# Altium PCB SensorSquare.PcbDoc
Units mil, origin at the board's own origin, x right, y up, seen from the top; angles counter-clockwise.
Board outline 2500 x 2500 mil, 2 copper layers (Top Layer, Bottom Layer); 45 components, 29 nets, 172 pads, 107 vias.
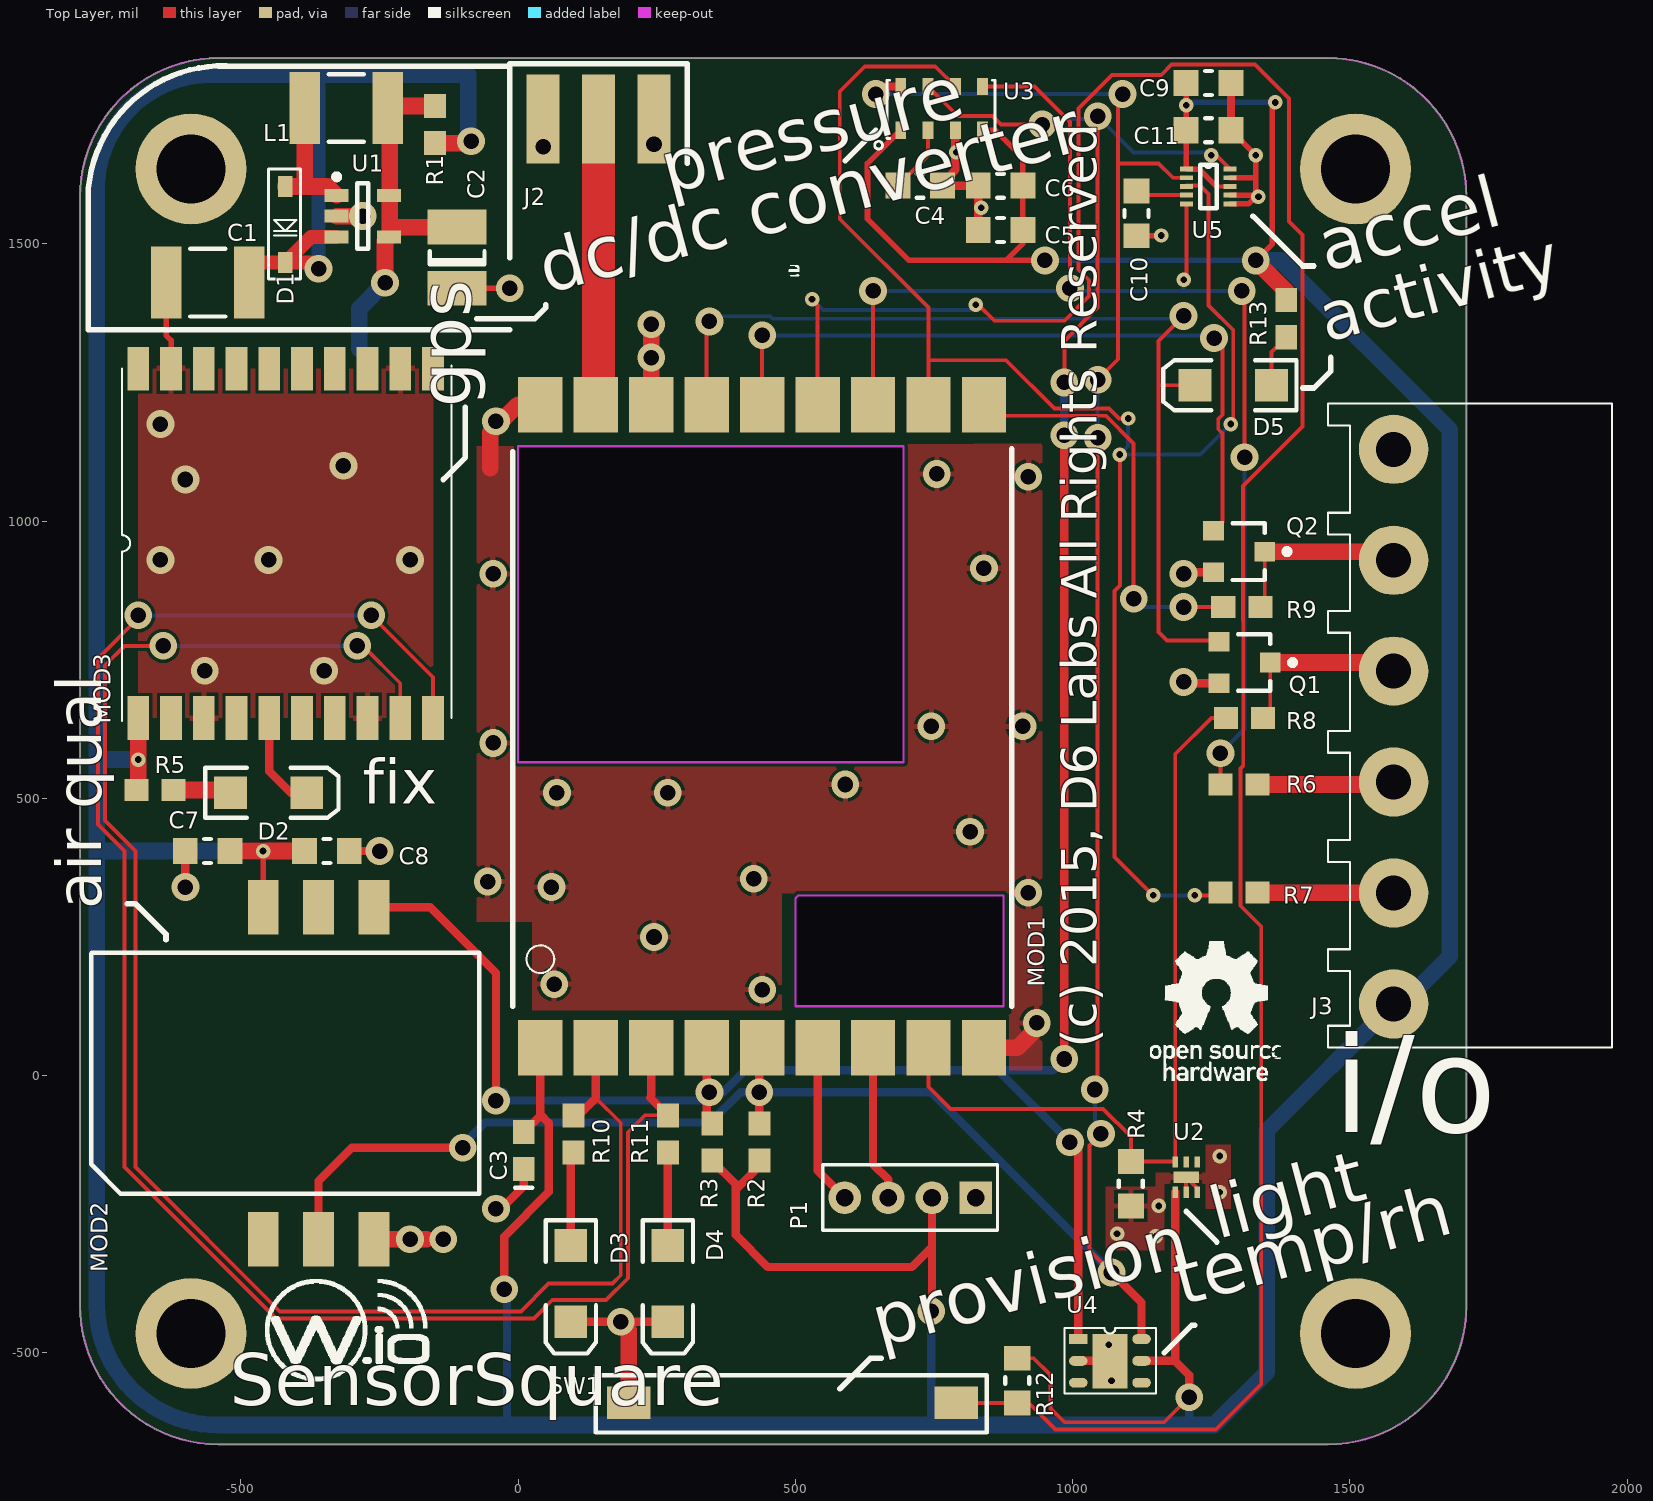
[diagram p0: Top Layer view]
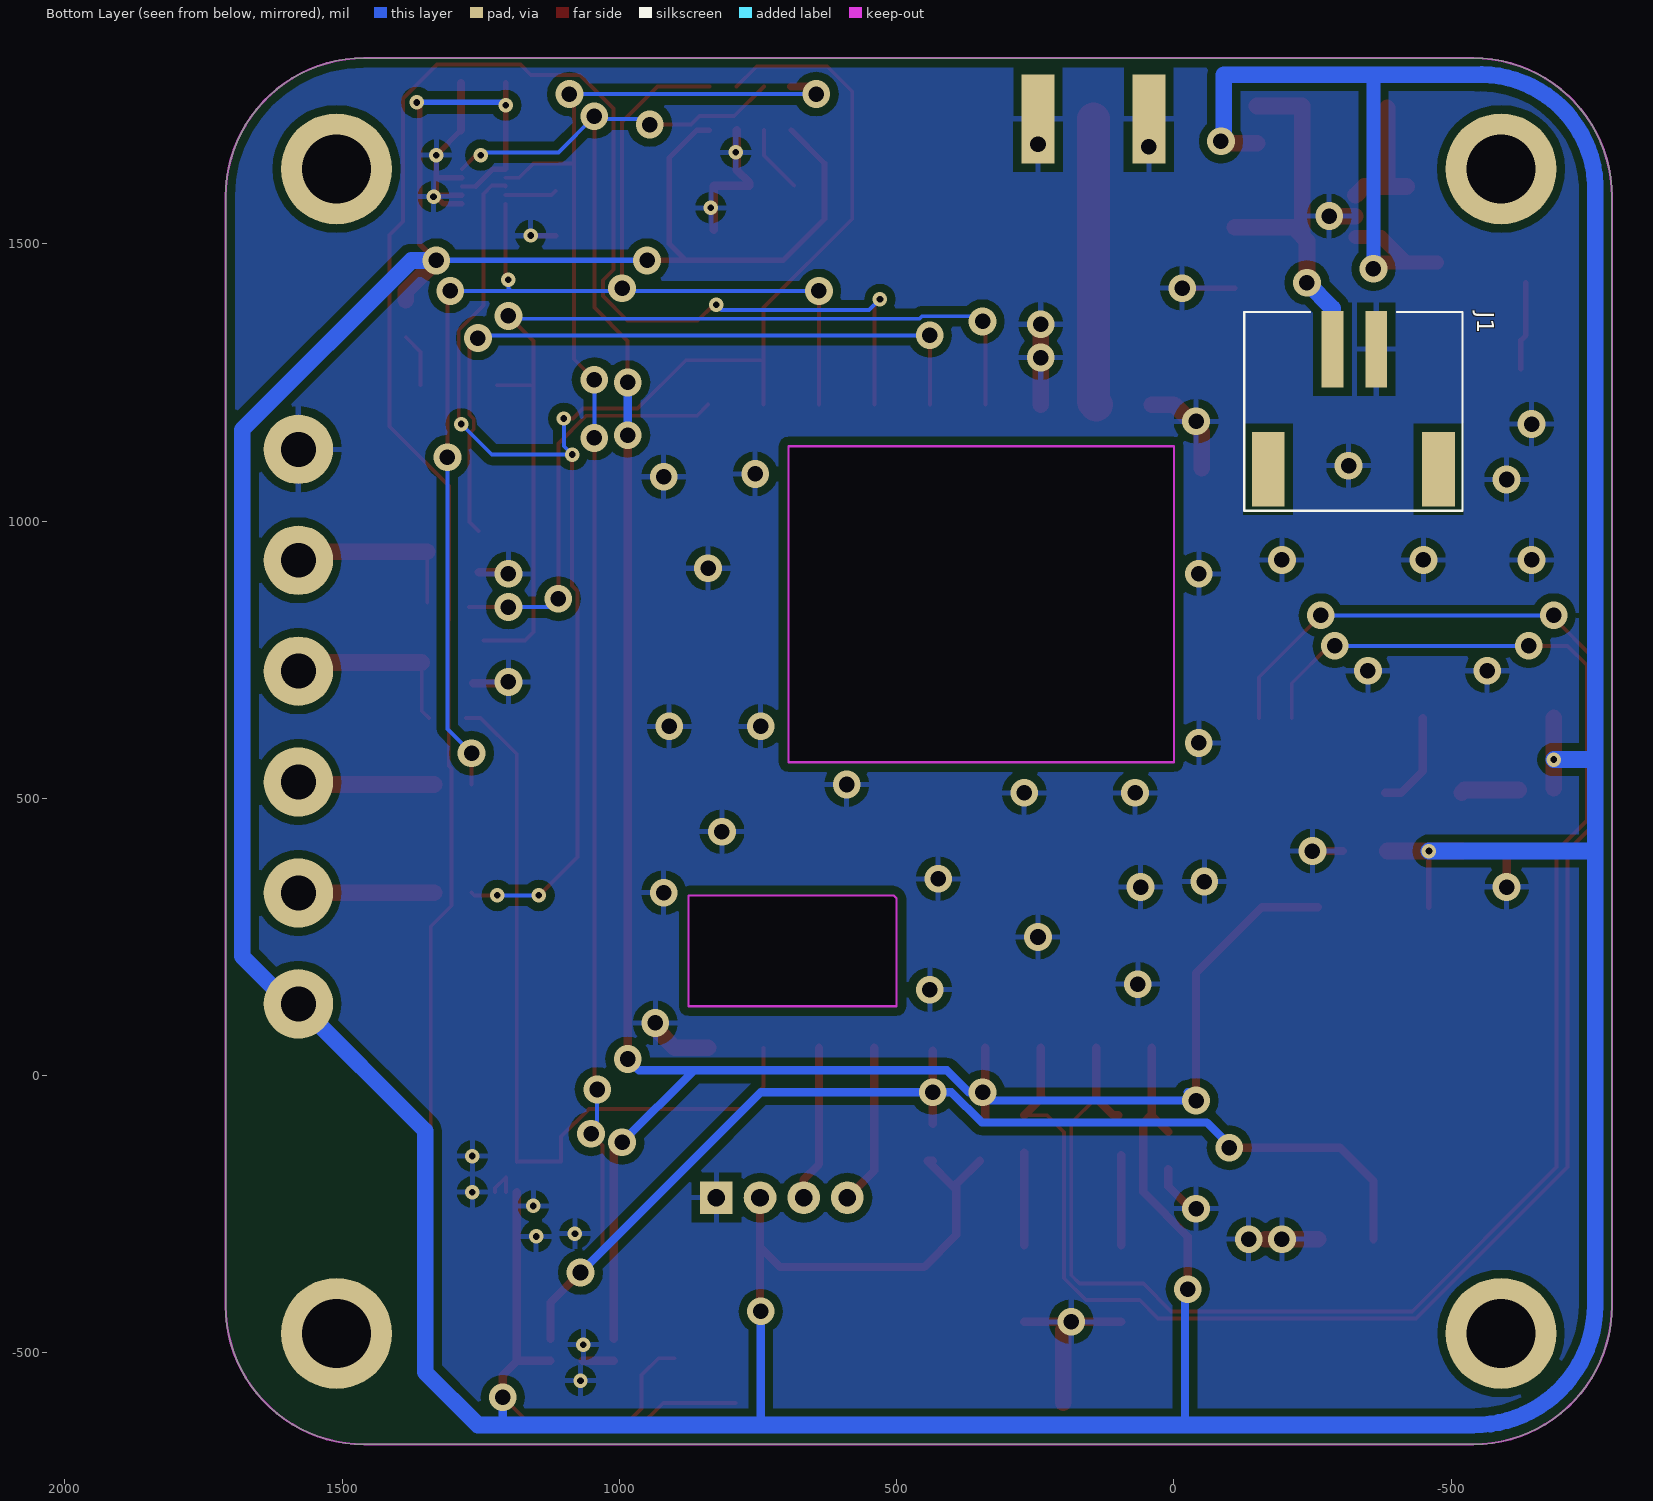
[diagram p1: Bottom Layer view, seen from below]

## Layer stack, top to bottom
Top Layer: signal copper 1.4
Dielectric: dielectric 12.6, FR-4, Dk 4.8
Bottom Layer: signal copper 1.4

## Board outline
-790,-415 -790,1585 cw(c-540,1585) -540,1835 1460,1835 cw(c1460,1585) 1710,1585 1710,-415 cw(c1460,-415) 1460,-665 -540,-665 cw(c-540,-415)
cut-out: 0,1135 0,565 695,565 695,1135
cut-out: 875,125 500,125 500,320 505,325 875,325

## Design rules (kind name [scope] priority, off if disabled: settings)
Clearance Clearance_1 [InNet('GND') And OnLayer('Bottom Layer')] p1: gap=15
Clearance [All] p2: gap=6
ComponentClearance [All] p1 off: gap=10 collisioncheckmode=3 verticalgap=10 showdistances=FALSE
HoleSize [All] p1: absolutevalues=TRUE maxlimit=150 minlimit=1 maxpercent=80.000 minpercent=20.000
MinimumSolderMaskSliver [All] p1 off: minsoldermaskwidth=10
PolygonConnect [All] p1: connectstyle=Relief reliefconductorwidth=10 reliefentries=4 polygonreliefangle="90 Angle"
RoomDefinition SensorSquare [InComponentClass('SensorSquare')] p1 off: confinementstyle=ConfineIn formatcopy=TRUE lockcomponents=FALSE outline -970,-665 10185,-665 10185,1920 -970,1920
RoutingVias [All] p1: holewidth=50 width=26 viastyle="Through Hole" minholewidth=12 minwidth=26 maxholewidth=28 maxwidth=50
SilkToSilkClearance [All] p1 off: silktosilkclearance=10
SilkscreenOverComponentPads [All] p1 off: minsilkscreentomaskgap=10
SolderMaskExpansion [All] p1: expansion=4
Width [All] p1: maxlimit=150 minlimit=7 preferedwidth=25
23 further rules are at their usual default settings.

## Components (designator, comment, footprint, x,y, rotation, side; value= is the part's Value field where it differs from the comment)
C1 "Cap Pol3" 1812 -560,1430 r180 top
C2 "22UF" 1210 -110,1475 r90 top
C3 "C0603" 0603 10,-135 r90 top
C4 ".01uF" D6_0603_RES 725,1605 r180 top
C5 "1000pF" D6_0603_RES 870,1525 r0 top
C6 ".01uF" D6_0603_RES 870,1605 r0 top
C7 ".01uF" D6_0603_RES -560,405 r0 top
C8 "1UF" D6_0603_RES -345,405 r180 top
C9 ".01uF" D6_0603_RES 1245,1790 r180 top
C10 ".01uF" D6_0603_RES 1115,1555 r90 top
C11 ".01uF" D6_0603_RES 1245,1705 r180 top
D1 "SCHOTKY DIODE" SOD123 -420,1535 r270 top
D2 "RXD" 3.2X1.6X1.1 -450,510 r0 top
D3 "RXD" 3.2X1.6X1.1 95,-375 r270 top
D4 "RXD" 3.2X1.6X1.1 270,-375 r270 top
D5 "RXD" 3.2X1.6X1.1 1289.5,1245 r180 top
J1 "BATTERY" S2B-PH-SM4 -365,1310 r270 bottom
J2 "SMA" RPSMA-EDGEMOUNT 145,1725 r90 top
J3 "6 POSITION PLUGGABLE HEADER" "6POS 5.08MM PLUGGABLE" 1500,90 r90 top
L1 "22UH" INDC4532 -310,1745 r180 top
MOD1 "WhiskerModule" WHISKER_SMD_DOLLY 40,50 r90 top
MOD2 "IAQ_ENGINE" IAQENGINE -70,-210 r90 top
MOD3 "GPS" GPS-SOP20 -685,645 r90 top
P1 "E1" 2MM4PINHDR 825,-220 r180 top
Q1 "BC846B" SOT23 1310,745 r270 top
Q2 "BC846B" SOT23 1300,945 r270 top
R1 "DNP" ERA-0603 -150,1715 r90 top
R2 "10K" 3-0603 435,-120 r270 top
R3 "10K" 3-0603 350,-120 r270 top
R4 "4.901K 1%" D6_0603_RES 1105,-195 r270 top
R5 "330" ERA-0603 -655,515 r0 top
R6 "DNP" ERA-0603 1300,525 r0 top
R7 "DNP" ERA-0603 1300,330 r0 top
R8 "DNP" ERA-0603 1310,645 r0 top
R9 "DNP" ERA-0603 1305,845 r0 top
R10 "330" ERA-0603 100,-105 r270 top
R11 "330" ERA-0603 270,-105 r270 top
R12 "330K" D6_0603_RES 900,-550 r270 top
R13 "330" ERA-0603 1385,1365 r270 top
SW1 "WAKEUP" MK23-35-B-2 495,-590 r180 top
U1 "500MA ALKALINE DC\DC BOOST REGULATOR SOT-23" SOT95P280X110-5N -280,1550 r0 top
U2 "Light Sensor" CUDFN6 1185,-210 r0 top
U3 "MPL3115A2" LGA8 690,1705 r90 top
U4 "Si7020" DFN6 1010,-475 r0 top
U5 "MMA8652" DFN10 1205,1635 r0 top

## Footprints (in the part's own frame and the unit in brackets; to place one, negate y for a bottom-side part, rotate by r counter-clockwise, add the part's x,y. Pads: shape width x height; smd on the part's side, far side on the other; paste and mask are expansions set on the pad)
2MM4PINHDR [mm]
  rect 1.5x1.5 hole 0.81: 1(0,0)
  round 1.5 hole 0.81: 2(2,0) 3(4,0) 4(6,0)
  silkscreen extent -1,-1.5 7,1.5
3-0603 [mm] "Chip Resistor; Body 1.6 x 0.9 mm (LxW typ)"
  rect 1.1x1 smd: 1(-0.85,0) 2(0.85,0)
3.2X1.6X1.1 [mm] "SMT LED; 2 Flat Leads"
  rect 1.5x1.5 smd: 1(-1.75,0) 2(1.75,0)
  silkscreen extent -2.9,-1.15 3.2,1.15
"6POS 5.08MM PLUGGABLE" [mm]
  round 3.175 hole 1.6: 1(1,-2) 2(6.08,-2) 3(11.16,-2) 4(16.24,-2) 5(21.32,-2) 6(26.4,-2)
  silkscreen extent -1,-12 28.5,1
0603 [mm] "Chip Capacitor; Body 1.6 x 0.8 mm (LxW typ)"
  rect 1.1x1 smd: 1(-0.85,0) 2(0.85,0)
  silkscreen extent -1.7,-0.4 -1.7,0.4
1210 [mm] "Chip Capacitor; Body 3.2 x 2.5 mm (LxW typ)"
  rect 1.6x2.7 smd: 1(-1.4,0) 2(1.4,0)
  silkscreen extent -0.3,-1.25 0.3,1.25
1812 [mm] "Chip Capacitor, Body 4.5x3.2mm, IPC High Density"
  rect 1.4x3.3 smd: 1(-1.9,0) 2(1.9,0)
  silkscreen extent -0.8,-1.55 0.8,1.55, body extent -2.4,-1.7 2.4,1.7, height 1.4
CUDFN6 [mm]
  rect 0.25x0.52 smd: 1(0,0) 2(0.5,0) 3(1,0) 4(1,1.38) 5(0.5,1.38) 6(0,1.38)
  rect 1.168x0.533 smd: PAD(0.5,0.682)
D6_0603_RES [mm] "Chip Resistor, 2-Leads, Body 2.0x1.2mm, IPC Medium Density"
  rect 1.14x1.2 smd: 1(-1.025,0) 2(1.025,0)
  silkscreen extent -0.15,-0.55 0.15,0.55, body extent -0.93,-0.41 0.77,0.39, height 0.56
DFN6 [mm]
  rect 0.85x0.45 smd: 1(0,0)
  oval 0.85x0.45 smd: 2(0,-1) 3(0,-2) 4(2.9,-2) 5(2.9,-1) 6(2.9,0)
  rect 1.6x2.5 smd: PAD(1.45,-1.016)
  silkscreen extent -0.64,-2.5 3.56,0.5
DFN10 [mm]
  rect 0.6x0.225 smd: 1(0,0) 2(0,-0.4) 3(0,-0.8) 4(0,-1.2) 5(0,-1.6) 6(2,-1.6) 7(2,-1.2) 8(2,-0.8) 9(2,-0.4) 10(2,0)
  silkscreen extent 0.64,-1.8 1.4,0.2
ERA-0603 [mm] "Chip Resistor; Body 1.6 x 0.8 mm (LxW typ)"
  rect 1.1x1 smd: 1(-0.85,0) 2(0.85,0)
GPS-SOP20 [mm]
  rect 2x1 smd: 1(0,0) 2(0,-1.5) 3(0,-3) 4(0,-4.5) 5(0,-6) 6(0,-7.5) 7(0,-9) 8(0,-10.5) 9(0,-12) 10(0,-13.5) 11(16,-13.5) 12(16,-12) 13(16,-10.5) 14(16,-9) 15(16,-7.5) 16(16,-6) 17(16,-4.5) 18(16,-3) 19(16,-1.5) 20(16,0)
  silkscreen extent -0.13,-14.35 16.13,0.75
IAQENGINE [mm]
  rect 2.5x1.4 smd: 1(-2.159,9.906) 2(-2.159,7.366) 3(-2.159,4.826) 4(13.041,4.826) 5(13.041,7.366) 6(13.041,9.906)
  silkscreen extent -0.07,0 10.96,17.78
INDC4532 [mm] "Chip Inductor, Body 4.5x3.2mm, IPC High Density"
  rect 1.4x3.3 smd: 1(-1.9,0) 2(1.9,0)
  silkscreen extent -0.8,-1.55 0.8,1.55, body extent -2.4,-1.7 2.4,1.7, height 0.55
LGA8 [mm]
  rect 0.8x0.5 smd: 1(0,0) 2(0,-1.25) 3(0,-2.5) 4(0,-3.75) 5(2,-3.75) 6(2,-2.5) 7(2,-1.25) 8(2,0)
  silkscreen extent -0.87,-4.32 2.29,1.19
MK23-35-B-2 [mm]
  rect 2x1.5 smd: 1(-7.5,0) 2(7.5,0)
  silkscreen extent -8.89,-1.27 9.02,1.36, body extent -7.8,-1.15 7.8,1.15, height 2.37
RPSMA-EDGEMOUNT [mil]
  rect 160x60 smd: 1(0,0) 2(0,100) 3(0,-100)
  rect 160x60 smd far side: 4(0,-100) 5(0,100)
  silkscreen extent -80,-160 100,160
S2B-PH-SM4 [mm]
  rect 3.5x1 smd: 1(0,0) 2(0,-2)
  rect 3.4x1.5 smd: P1(5.5,-4.95) P1(5.5,2.85)
  silkscreen extent -1.7,-6.05 7.4,3.95
SOD123 [mm]
  rect 0.97x0.65 smd: A(-1.74,0) K(1.74,0)
  silkscreen extent -2.54,-0.76 2.5,0.7, body extent -1.43,-0.76 1.43,0.74, height 0.57
SOT23 [mm] "SOT-23; 3 Leads; Body 3.1 x 2.5 mm, inc. leads (LxW max), Alternate Lead Configuration"
  rect 0.9x0.95 smd: 1(0,1.175) 2(0.95,-1.175) 3(-0.95,-1.175)
  silkscreen extent -1.3,-0.3 1.3,2.33
SOT95P280X110-5N [mm] "SOT23, 5-Leads, Body 3.0x3.0mm (max), Pitch 0.95mm, IPC Medium Density"
  rect 1.1x0.6 smd: 1(-1.2,0.95) 2(-1.2,0) 3(-1.2,-0.95) 4(1.2,-0.95) 5(1.2,0.95)
  silkscreen extent -1.32,-1.5 0.25,1.92, body extent -1.6,-1.52 1.6,1.48, height 0.92
WHISKER_SMD_DOLLY [mil]
  rect 100x80 smd: 1(0,0) 2(0,-100) 3(0,-200) 4(0,-300) 5(0,-400) 6(0,-500) 7(0,-600) 8(0,-700) 9(0,-800) 10(1160,-800) 11(1160,-700) 12(1160,-600) 13(1160,-500) 14(1160,-400) 15(1160,-300) 16(1160,-200) 17(1160,-100) 18(1160,0)
  silkscreen extent 75,-850 1080,50

## Part data
C1: "Polarized Capacitor (Surface Mount)"
C2 C4 C5 C6 C7 C8 C9 C10 C11: library part C1210, "Ceramic Chip Capacitor - Standard"
C3: "Ceramic Chip Capacitor - Standard"
D1: "SCHOTKY DIODE SOD-123"
D2 D3 D4 D5: library part LED2, "Typical RED, GREEN, YELLOW, AMBER GaAs LED"
J1: library part S2B-PH-SM4-TB, "2 POSITION, 2MM RIGHT ANGLE CONNECTOR"
L1: library part Inductor, "Inductor"
MOD1: "Whisker Footprint"
MOD2: "Indoor Air Quality Sensor Module"
MOD3: library part ULTIMATEGPS
P1: library part 2MM4PINHDR
Q1 Q2: "SOT23 NPN Silicon Planar General Purpose Transistor"
R1 R4 R5 R6 R7 R8 R9 R10 R11 R12 R13: library part ERA3Y, "Rectangular Thick Film Chip Resistor, 10 Ohm to 330k Ohm Range, 0.1% and 0.5% Tolerance, 0603 Size, 0.063 W"
R2 R3: library part ERJ3BQ, "Low Ohmic Value Thick Film Chip Resistor, 0.22 Ohm to 9.1 Ohm Range, 1%, 2% and 5% Tolerance, 0603 Size, 0.2 W"
SW1: library part MK23-35-B-2, "SMT Reed Switch"
U1: "SP6641A"
U2: library part NOA1212, "Ambient Light Sensor with Dark Comp"
U3: "Precision altimeter"
U4: "I2C Temperature and Humidity Sensor"
U5: "3-axis, 12-bit accelerometer"

## Free pads (board coordinates)
  round 200 hole 125 unplated paste-900: 0(-590,1635) 1(1510,1635) 2(1510,-465) 3(-590,-465)

## Via types
v1: diameter 50, hole 28, Top Layer to Bottom Layer, 82 vias
v2: diameter 26, hole 12, Top Layer to Bottom Layer, 25 vias

## Nets (pads, with @x,y where several pads share a name; then routed paths per layer and width w, separated by ;. In a path a pad name is that pad's centre, name@x,y a point inside that pad or via, vN(x,y) a via of type N, cw(c..) or ccw(c..) an arc to the next point about the centre after c; other vN are vias at no path point)
GND: C1.2 C2.1 C3.1 C4.1 C5.1 C6.1 C7.1 C8.1 C9.1 C10.1 C11.1 D3.2 D4.2 J1.1 J2.2 J2.3 J2.4 J2.5 J3.6 MOD1.9 MOD1.16 MOD1.18 MOD2.3 MOD3.3 MOD3.8 MOD3.12 MOD3.19 P1.1 Q1.2 Q2.2 R4.2 SW1.2 U1.2 U2.2 U2.3 U2.PAD U3.3 U4.2 U4.PAD U5.6 U5.7 U5.9 | length 2240.4
  Top Layer w7: U2.2 U2.PAD 1224.37,-202.83 U2.3
  Top Layer w10: C1.2 -634.8,1334.8 -625.94,1325.94 MOD3.19 ; C2.1 -15.12,1419.88 v1(-15,1420) ; C10.1 1159.65,1514.65 v2(1160,1515) ; U5.6 1317.01,1572.01 v2@1330,1585 ; U5.7 1327.24,1587.76 v2@1330,1585 ; U5.9 1329.25,1619.25 ; C11.1 1330,1660.35 v2(1330,1660) v2@1330,1585
  Top Layer w15: C7.1 -600.35,340.35 v1(-600,340) ; C8.1 v1(-250,405) ; v1(-40,-240) -30,-240 10,-200 C3.1 ; D3.2 v1(185,-443.9) D4.2 ; U3.3 788.43,1633.43 765.35,1610.35 C4.1 C6.1 C5.1 ; U4.2 U4.PAD@1066.46,-514.37 ; v1(1200,710) 1202.4,707.6 Q1.2 ; v1(1200,905) 1202.6,907.6 Q2.2 ; C11.1 C9.1
  Top Layer w30: U1.2 v1(-280,1550) ; MOD2.3 v1(-195,-295) -165,-295 ; -50,1095 -50,1160 0,1210 MOD1.18 ; SW1.2 v1@199.72,-458.62 ; MOD1.16 v1(240,1295) v1@240,1340 ; MOD1.9 900,50 v1@935,85
  other v1: -135,-295 935,95 440,155 65,165 245,250 920,330 60,340 -55,350 425,355 815,440 70,510 270,510 590,525 -45,600 745,630 910,630 -565,730 -350,730 -45,905 840,915 -645,930 -450,930 -195,930 -600,1075 920,1080 755,1085 -315,1100 -645,1175 -40,1180 240,1355 45,1675 245,1680
  other v2: 1070,-550 1065,-485 1150,-290 1080,-285 1155,-235 1265,-210 1265,-145 835,1565 1335,1585 790,1665
NetC2_2: C2.2 J1.2 L1.1 R1.2 U1.4 U1.5 | length 671.3
  Top Layer w30: v1(-240,1430) -240,1505.35 U1.4 U1.4@-231.73,1513.62 ; R1.2 -231.73,1748.46 U1.4@-231.73,1513.62 ; C2.2 -215.24,1530.12 U1.4@-231.73,1513.62
  Bottom Layer w30: J1.2 -286.26,1383.74 v1(-240,1430)
NetC4_2: C4.2 U3.2 | length 122.6
  Top Layer w7: C4.2 739.21,1659.57 U3.2
NetC10_2: C10.2 U5.4 | length 93.1
  Top Layer w7: C10.2 1122.6,1587.76 U5.4
NetD1_A: D1.A L1.2 U1.1 | length 242.2
  Top Layer w30: D1.A -381.67,1603.5 ; L1.2 -384.8,1606.63 -381.67,1603.5 ; U1.1 -343.35,1603.5 -381.67,1603.5
NetD2_1: D2.1 R5.2 | length 104.7
  Top Layer w30: R5.2 -523.9,515 D2.1
NetD2_2: D2.2 MOD3.5 | length 180
  Top Layer w15: MOD3.5 -448.78,548.78 -410,510 D2.2
NetD3_1: D3.1 R10.2 | length 162.6
  Top Layer w15: D3.1 R10.2@95,-143.46
NetD4_1: D4.1 R11.2 | length 167.6
  Top Layer w15: D4.1 R11.2
NetD5_1: D5.1 R13.2 | length 97.6
  Top Layer w7: D5.1 1358.4,1304.93 R13.2
NetD5_2: D5.2 MOD1.15 Q1.3 | length 1763.3
  Top Layer w7: MOD1.15 340,1360 v1(345,1360) ; 1160,1245 D5.2 ; v1(1200,1370) 1155,1325 1155,800 1170,785 1245,785
  Bottom Layer w7: v1(345,1360) 354.5,1369.5 454.29,1369.5 458.79,1365 1195,1365 v1(1200,1370)
NetJ2_1: J2.1 MOD1.17 | length 517.1
  Top Layer w60: MOD1.17 145,1215 J2.1
NetJ3_2: J3.2 R7.2 | length 244.6
  Top Layer w30: R7.2 J3.2@1578.11,330
NetJ3_3: J3.3 R6.2 | length 240.9
  Top Layer w30: R6.2 J3.3@1574.37,525
NetJ3_4: J3.4 Q1.1 R8.2 | length 334.3
  Top Layer w7: R8.2 1356.26,657.8 Q1.1
  Top Layer w30: Q1.1 1563.11,745 J3.4
NetJ3_5: J3.5 Q2.1 R9.2 | length 331.2
  Top Layer w7: R9.2@1346.26,852.8 Q2.1
  Top Layer w30: Q2.1 1563.11,945 J3.5
NetMOD1_2: MOD1.2 MOD3.9 R10.1 | length 3046.5
  Top Layer w7: v1(-640,775) -710,775 -745,740 -745,460 -690,405 -690,-165 -430,-425 5,-425 55,-375 170,-375 185,-360 185,-85 140,-40 ; v1@-280,775 -212.56,707.56 MOD3.9
  Top Layer w15: R10.1 108.46,-71.54 140,-40 MOD1.2
  Bottom Layer w7: v1(-640,775) v1(-290,775)
NetMOD1_3: MOD1.3 MOD3.10 R11.1 | length 3230.7
  Top Layer w7: v1(-685,830) -685,825 -758,752 -758,453 -710,405 -710,-165 -437,-438 28.41,-438 61.54,-404.87 158.51,-404.87 198,-365.38 198,-102 228.46,-71.54 R11.1 ; v1(-265,830) -153.5,718.5 MOD3.10
  Top Layer w15: MOD1.3 240,-38.46 238.46,-40 R11.1
  Bottom Layer w7: v1(-685,830) v1(-265,830)
NetMOD1_4: MOD1.4 MOD2.4 R3.1 U3.7 U4.1 U5.10 | length 4590.6
  Top Layer w7: U3.7 792.7,1730.25 855.26,1730.25 870.51,1715 v1(945,1715) ; v1(985,1250) 985,1325 1045,1385 v1(1045,1730) ; v2(1250,1660) 1258.74,1660 U5.10
  Top Layer w15: MOD2.4 -158.43,303.43 -40,185 v1(-40,-45) ; R3.1@340,-76.54 MOD1.4 ; v1(985,30) v1(985,1155) ; v1(995,-120) 1010,-135 U4.1
  Bottom Layer w7: v1(945,1715) 955,1725 1040,1725 v1(1045,1730) 1110,1665 1245,1665 v2(1250,1660)
  Bottom Layer w15: v1@-25,-30 v1(-40,-45) 330,-45 v1(345,-30) 369.75,-30 409.25,9.5 865.5,9.5 ; v1(985,30) 964.5,9.5 865.5,9.5 ; v1(985,1155) v1(985,1250) ; v1(995,-120) 865.5,9.5
NetMOD1_5: MOD1.5 MOD2.2 R2.1 U3.8 U4.6 U5.2 | length 4818.5
  Top Layer w7: v1(1040,-25) 1045,-20 v1(1045,1150) ; v1(1045,1255) 1081.88,1291.88 1081.88,1645 ; v1(1051,-104.79) 1030,-125.79 1030,-315 v1(1070,-355) ; v1(1090,1770) 1081.88,1761.88 1081.88,1645 ; U5.2 1180.75,1619.25 1155,1645 1081.88,1645
  Top Layer w15: MOD2.2 -360,-190 -300,-130 v1(-100,-130) ; R2.1 v1(435,-30) MOD1.5@435,45 ; v1(645,1770) 658.74,1783.74 U3.8 ; v1(1070,-355) 1124.17,-409.17 U4.6
  Bottom Layer w7: v1(645,1770) v1(1090,1770) ; v1(1040,-25) 1040,-95 1041.21,-95 v1(1051,-104.79) ; v1(1045,1150) v1(1045,1255)
  Bottom Layer w15: v1(-100,-130) -100,-125 -59.5,-84.5 346.36,-84.5 400.86,-30 v1(435,-30) 745,-30 v1(1070,-355)
NetMOD1_6: MOD1.6 P1.4 | length 290.2
  Top Layer w15: MOD1.6 540,-171.22 P1.4
NetMOD1_7: MOD1.7 P1.3 | length 281.4
  Top Layer w15: MOD1.7 640,-160 667.52,-187.52 P1.3
NetMOD1_8: MOD1.8 R4.1 R8.1 U2.6 | length 1451.5
  Top Layer w7: MOD1.8 740,-20 780,-60 1055,-60 1105,-110 R4.1 1183.98,-154.65 U2.6 1185,580 1250,645 R8.1
NetMOD1_10: MOD1.10 R9.1 | length 746.7
  Top Layer w7: MOD1.10 860,1190 1060,1190 1110,1140 v1(1110,860) ; v1(1200,845) R9.1
  Bottom Layer w7: v1(1110,860) 1125,845 v1(1200,845)
NetMOD1_11: MOD1.11 R7.1 U3.6 U5.3 | length 3005.2
  Top Layer w7: MOD1.11 740,1290 ; U3.6 752.17,1820 625,1820 580,1775 580,1545 740,1385 740,1290 ; v2(1085,1120) 1085,883.79 1075.5,874.29 1075.5,394.5 v2(1145,325) ; v2(1100,1185) 1083.38,1185 1065.38,1203 967,1203 880,1290 740,1290 ; U5.3 1205,1605 1230,1605 1245,1590 1245,1388.79 1289.5,1344.29 1289.5,1179.5 v2(1285,1175) ; v2(1220,325) 1261.54,325 R7.1
  Bottom Layer w7: v2(1100,1185) 1100,1135 v2(1085,1120) 1230,1120 v2(1285,1175) ; v2(1145,325) v2(1220,325)
NetMOD1_12: MOD1.12 R6.1 U3.5 U5.5 | length 2425
  Top Layer w7: MOD1.12 v1(640,1415) ; U3.5 931.26,1783.74 995,1720 v1(995,1420) ; v2(1200,1435) 1205,1440 U5.5 ; R6.1 v1(1266.54,581.54) ; v1(1305,1415) 1310,1410 v1(1310,1115)
  Bottom Layer w7: v1(640,1415) 1195,1415 ; v2(1200,1435) 1200,1420 1195,1415 ; v1(1266.54,581.54) 1310,625 v1(1310,1115) ; v1(1305,1415) 1195,1415
NetMOD1_13: MOD1.13 R12.2 SW1.1 | length 4513.7
  Top Layer w7: v2(530,1400) 540,1390 MOD1.13 ; SW1.1 920.86,-590 968.86,-638 1258,-638 1340,-556 1340,268.69 1302.31,306.38 1302.31,554.19 1307.69,559.56 1307.69,821 1307.31,821.38 1307.31,1063.52 1414.19,1170.39 1414.19,1515.81 1390,1540 1390,1761.82 1328.7,1823.12 1178.27,1823.12 1159.65,1804.5 1070.71,1804.5 1010.5,1744.29 1010.5,1453.29 1029.5,1434.29 1029.5,1405.71 985,1361.21 858.79,1361.21 830,1390 v2(825,1390)
  Bottom Layer w7: v2(530,1400) 549.5,1380.5 815.5,1380.5 v2(825,1390)
NetMOD1_14: MOD1.14 Q2.3 | length 1308.8
  Top Layer w7: MOD1.14 v1(440,1335) ; Q2.3 1270,998.66 1270,1158.18 1262.5,1165.68 1262.5,1184.32 1270,1191.82 1270,1315 v1(1255,1330)
  Bottom Layer w7: v1(440,1335) 1250,1335 v1(1255,1330)
VCC: C1.1 C3.2 C5.2 C6.2 C7.2 C8.2 C9.2 C11.2 D1.K J3.1 MOD1.1 MOD2.6 MOD3.1 P1.2 R1.1 R2.2 R3.2 R5.1 R12.1 R13.1 U1.3 U2.1 U3.1 U3.4 U4.5 U5.1 U5.8 | length 13619.1
  Top Layer w7: R12.1 929.65,-509.65 960,-540 960,-600 985,-625 1165,-625 v1(1210,-580) ; 1258.99,1603.5 U5.8
  Top Layer w10: MOD2.6 v2(-460,405) ; U3.1 630,1645 630,1545 705,1470 880,1470 ; U3.4 860,1705 910.35,1654.65 C6.2 C5.2 910.35,1500.35 880,1470 ; v1(950,1470) 880,1470 ; C9.2 1205,1789.65 v2(1205,1750) U5.1 1205.32,1634.68 1227.81,1634.68 1258.99,1603.5 ; v1(1330,1470) 1360,1500 1360,1745 1370,1755 v2(1365,1755)
  Top Layer w15: v1(-25,-385) -25,-290 55,-210 55,-85 40,-70 ; C3.2 40,-71.54 40,-70 ; MOD1.1 40,-70 ; R3.2 391.54,-195 392.5,-195 392.5,-205 ; R2.2 444.04,-153.46 392.5,-205 ; v1(745,-425) 746.26,-423.74 746.26,-308.74 ; P1.2 746.26,-308.74 ; U4.5 1184.37,-514.37 ; U2.1 1185,-513.74 1184.37,-514.37 ; v1(1210,-580) 1210,-540 1184.37,-514.37 ; 392.5,-205 392.5,-287.5 450,-345 710,-345 746.26,-308.74
  Top Layer w25: C1.1@-475,1466.5 D1.K ; v1(-360,1455) -371.5,1466.5 D1.K ; U1.3 -373.9,1512.6 D1.K
  Top Layer w30: R5.1@-685,518.46 v2(-685,570) MOD3.1 ; C7.2 v2(-460,405) C8.2 ; R1.1 -88.46,1681.54 v1(-85,1685) ; v1(1330,1470) 1385,1415 R13.1
  Bottom Layer w10: v1(950,1470) v1(1330,1470) ; v2(1205,1750) 1210,1755 v2(1365,1755)
  Bottom Layer w15: v1(-25,-385) -20,-390 -20,-630 ; 745,-630 v1(745,-425) ; 1210,-630 v1(1210,-580)
  Bottom Layer w25: v1(-360,1455) -360,1795
  Bottom Layer w30: -755,570 v2(-685,570) ; v2(-460,405) -760,405 ; v1(-85,1685) -90,1680 -90,1805 -540,1805 ccw(c-552.5,1597.5) -760,1610 -760,405 ; v1(1330,1470) 1375,1470 1680,1165 1680,215 1594.37,129.37 J3.1 1350,-99.37 1350,-535 1255,-630 1210,-630 745,-630 -20,-630 -540,-630 cw(c-542.5,-412.5) -760,-415 -760,405
pads on no net: J1.P1 MOD2.1 MOD2.5 MOD3.2 MOD3.4 MOD3.6 MOD3.7 MOD3.11 MOD3.13 MOD3.14 MOD3.15 MOD3.16 MOD3.17 MOD3.18 MOD3.20 U2.4 U2.5 U4.3 U4.4

## Polygon pours and split planes (outlines as drawn)
GND on Top Layer "Mid-Layer 1-No Net" (solid, remove dead copper, pour order 2): 1190,-175 1150,-175 1150,-200 1060,-200 1060,-315 1160,-315 1165,-315 1165,-195 1240,-195 1240,-240 1285,-240 1285,-125 1240,-125 1240,-175 1195,-175
GND on Top Layer "Mid-Layer 1-No Net" (solid, remove dead copper, pour order 4): -685,645 -153.5,645 -153.5,1274.92 -685,1274.92
GND on Top Layer "Mid-Layer 1-No Net" (solid, remove dead copper, pour order 6): 40,1135.31 -75,1135.31 -75,535.15 -75,277.26 25,277.26 25,117.84 475,117.84 475,328.84 890,328.84 890,178.8 890,113.15 855,80.33 850,75.64 850,10 945,10 945,1140
GND on Bottom Layer "Mid-Layer 1-No Net" (solid, remove dead copper, pour order 8): -805,1835 1715,1835 1715,1395 1715,-660 -775,-660 -790,-645

## Keep-outs
Keep-Out Layer:
  lines w3.94: -790,-415 ccw(c-540,-415) -540,-665 1460,-665 ccw(c1460,-415) 1710,-415 1710,1585 ccw(c1460,1585) 1460,1835 -540,1835 ccw(c-540,1585) -790,1585 -790,-415 ; 0,565 0,1135 695,1135 695,565 0,565 ; 500,125 875,125 875,325 505,325 500,320 500,125

## Silkscreen, mask and mechanical layers (free items; w line width, h text height)
Top Overlay:
  drawing of 2045 lines, arcs and shapes, not listed
  text "pressure" at 280,1560 h160 r15
  text "accel" at 1465,1420 h160 r15
  text "dc/dc converter" at 60,1380 h160 r15
  text "activity" at 1465,1295 h150 r15
  text "gps" at -55,1205 h160 r90
  text "fix" at -280,490 h80
  text "air qual" at -725,300 h140 r90
  text "(c) 2015, D6 Labs All Rights Reserved" at 1065,50 h110 r90
  text "i/o" at 1470,-160 h300
  text "light" at 1270,-325 h160 r15
  text "temp/rh" at 1205,-445 h160 r15
  text "provision" at 660,-520 h160 r15
  text "SensorSquare" at -520,-625 h160